# Altium PCB BT_Lamp_Controller.PcbDoc
Units mm, origin at the board's own origin, x right, y up, seen from the top; angles counter-clockwise.
Board outline 34.8 x 36.45 mm, 2 copper layers (Top Layer, Bottom Layer), stack 1.671 mm thick; 25 components, 23 nets, 122 pads, 35 vias.
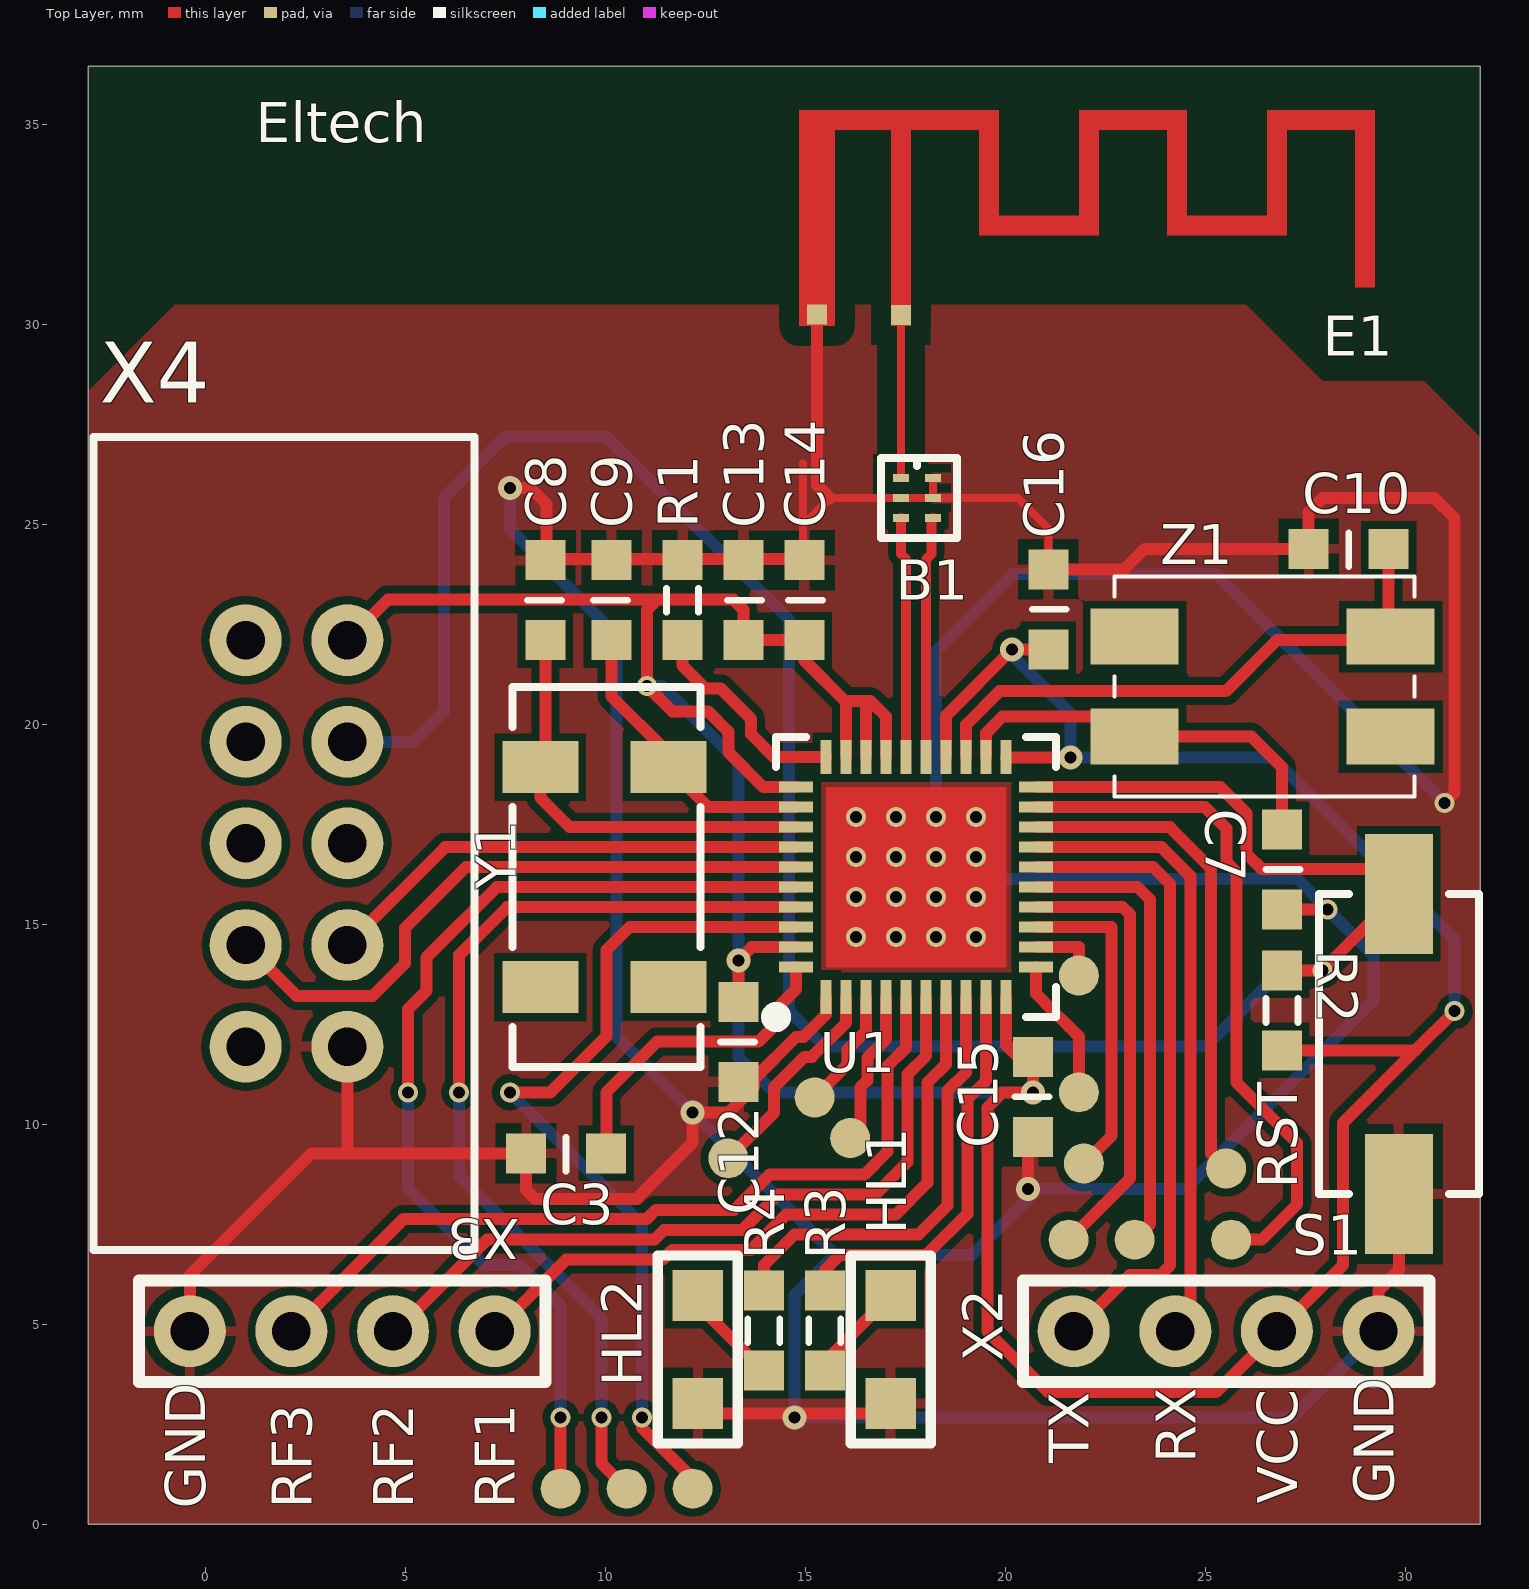
[diagram p0: Top Layer view]
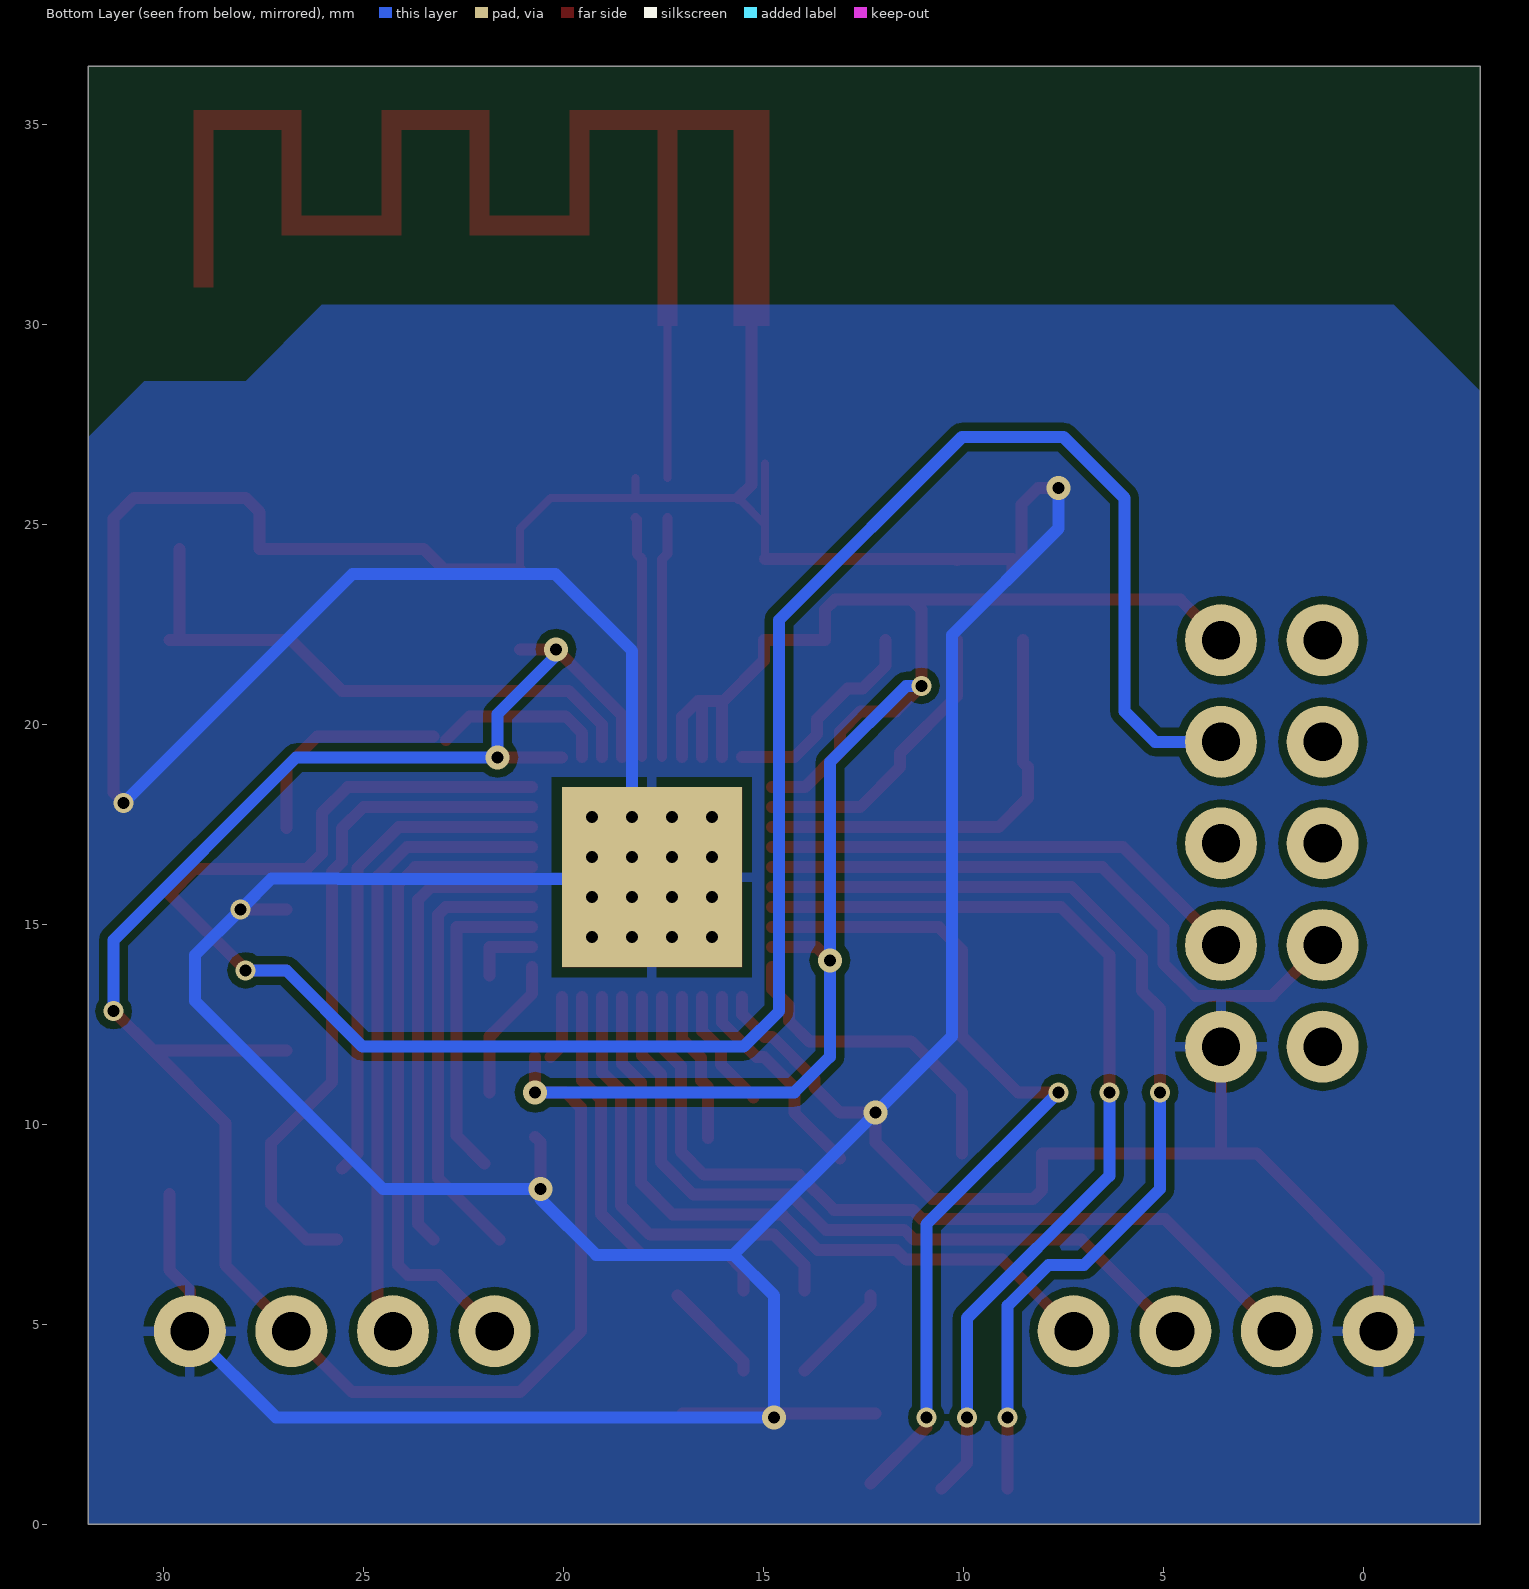
[diagram p1: Bottom Layer view, seen from below]
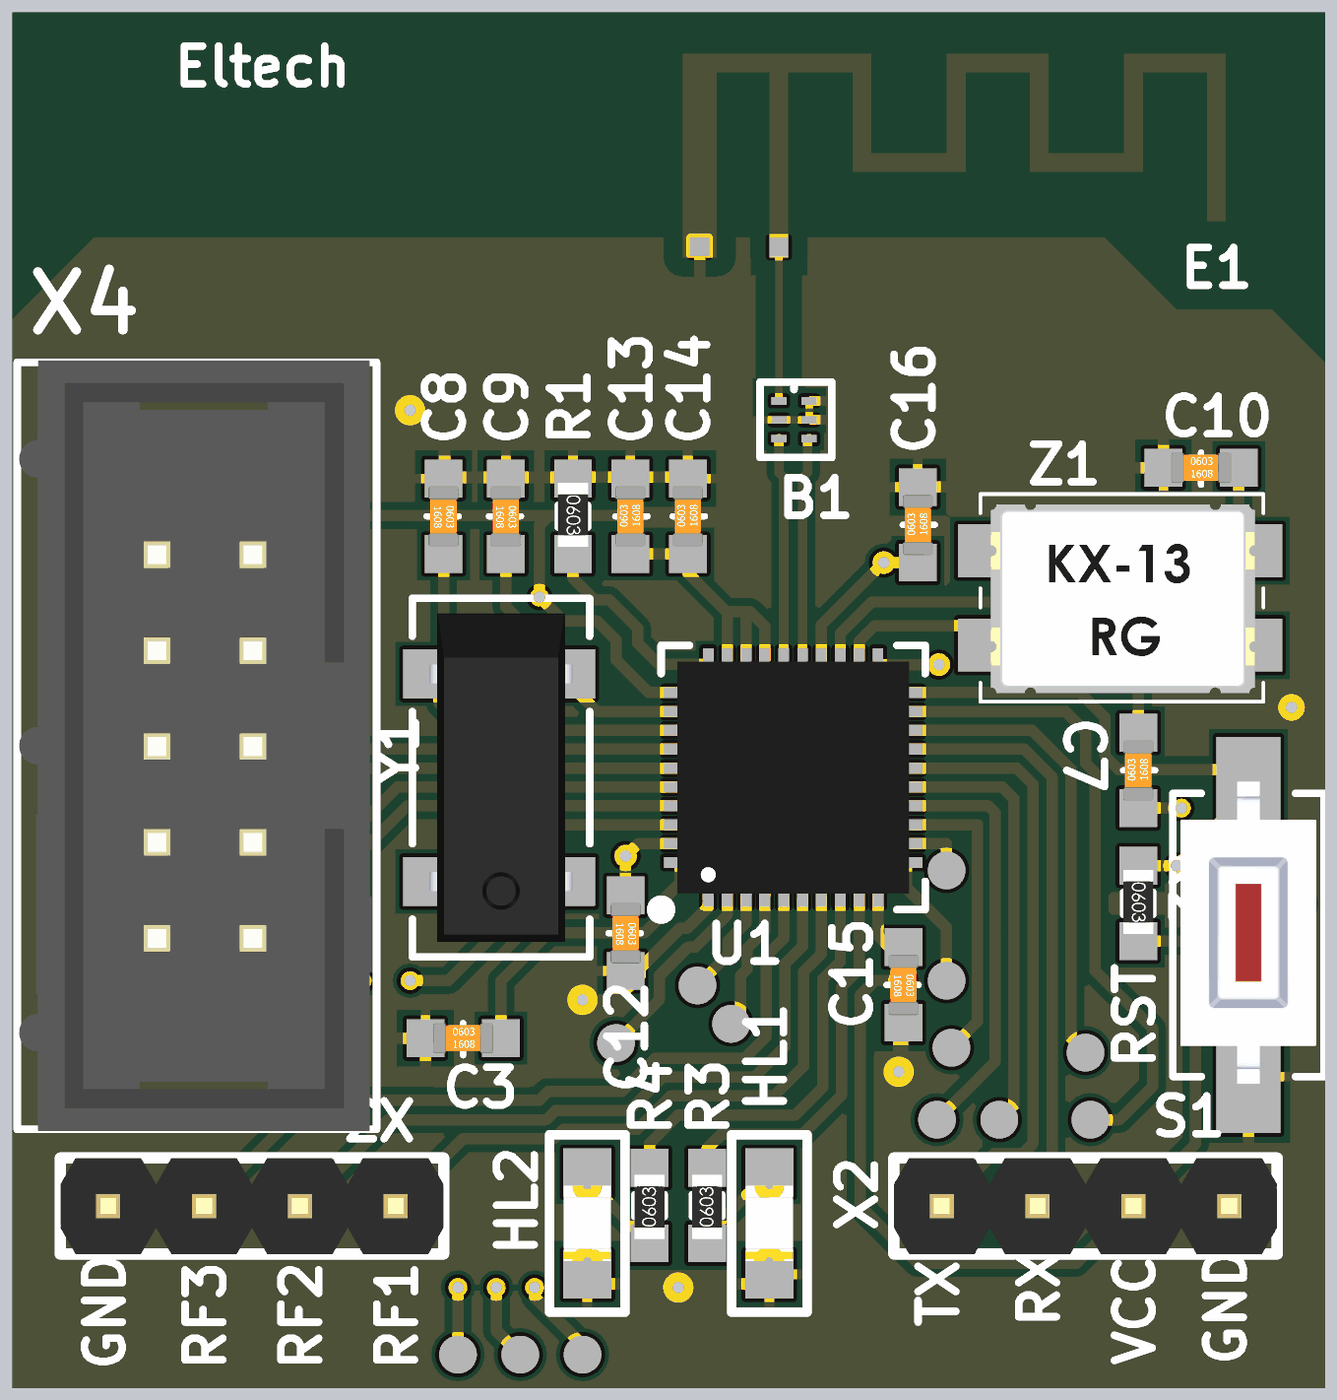
[diagram p2: 3D render of the assembled board from above, using the file's embedded part models]

## Layer stack, top to bottom
Top Solder: solder mask 0.0102, Solder Resist, Dk 3.5
Top Layer: signal copper 0.0356
Dielectric 1: dielectric 1.6, FR-4, Dk 4.8
Bottom Layer: signal copper 0.0356
Bottom Solder: solder mask 0.0102, Solder Resist, Dk 3.5

## Board outline
-2.921,0 -2.921,36.449 31.877,36.449 31.877,0

## Design rules (kind name [scope] priority, off if disabled: settings)
Clearance Poly-Ant [InPoly vs InNet('NetB1_1')] p1: gap=0.5
Clearance Clearance_1 [All] p2: gap=0.2
PolygonConnect "Poly to via" [All vs IsVia] p1: connectstyle=Direct reliefconductorwidth=0.254 reliefentries=4 polygonreliefangle="90 Angle" airgapwidth=0.254
PolygonConnect PolygonConnect_1 [All] p2: connectstyle=Relief reliefconductorwidth=0.254 reliefentries=4 polygonreliefangle="90 Angle" airgapwidth=0.254
RoutingVias [All] p1: holewidth=0.711 width=1.27 viastyle="Through Hole" minholewidth=0.711 minwidth=1.27 maxholewidth=0.711 maxwidth=1.27
ShortCircuit Ant [InNet('GND') vs InNet('NetB1_1')] p1: allowed=TRUE
SolderMaskExpansion Antenna [HasFootprint('2.4 INF Antenna')] p1: expansion=-100
SolderMaskExpansion SolderMaskExpansion_1 [All] p2: expansion=0.102
Width [All] p1: maxlimit=5 minlimit=0.15 preferedwidth=0.254
29 further rules are at their usual default settings.

## Components (designator, comment, footprint, x,y, rotation, side; value= is the part's Value field where it differs from the comment)
B1 "Balun" "2.4 Balun 50Ohm LFB182G45BG2D280" 17.399,26.154 r90 top
C3 "1uF" C0603 8.128,9.271 r0 top
C7 "22pF" C0603 26.924,15.467 r90 top
C8 "10pF" C0603 8.509,23.998 r270 top
C9 "10pF" C0603 10.16,23.998 r270 top
C10 "22pF" C0603 27.691,24.384 r0 top
C12 "100nF" C0603 13.335,12.954 r270 top
C13 "100nF" C0603 13.462,22.198 r90 top
C14 "100nF" C0603 14.986,22.198 r90 top
C15 "100nF" C0603 20.701,11.584 r270 top
C16 "100nF" C0603 21.082,21.971 r90 top
E1 "Antenna" "2.4 INF Antenna" 14.849,29.956 r0 top
HL1 "LED" LED_0805 17.145,5.715 r270 top
HL2 "LED" LED_0805 12.319,5.715 r270 top
R1 "56k" R0603 11.938,23.998 r270 top
R2 "10k" R0603 26.924,13.743 r270 top
R3 "150" R0603 15.494,3.937 r90 top
R4 "150" R0603 13.97,3.937 r90 top
S1 "Tact_switch" Tact_switch_smd 29.845,8.255 r90 top
U1 "CC2541" "QFN40 6x6 0.5pitch" 15.526,13.177 r90 top
X2 "USART" "Pins 4x2.54" 21.717,4.826 r0 top
X3 "RF_DB" "Pins 4x2.54" 7.239,4.826 r180 top
X4 "IDC-10" IDC-10 3.556,11.938 r0 top
Y1 "32.756kHz" "Geyer KX - 327S 32.768kHz" 8.382,18.923 r270 top
Z1 "32MHz" "kx 13 12MHz" 23.241,22.185 r0 top

## Footprints (in the part's own frame and the unit in brackets; to place one, negate y for a bottom-side part, rotate by r counter-clockwise, add the part's x,y. Pads: shape width x height; smd on the part's side, far side on the other; paste and mask are expansions set on the pad)
"2.4 Balun 50Ohm LFB182G45BG2D280" [mm]
  rect 0.2x0.4 smd: 1(0,0) 2(-0.5,0) 3(-1,0) 4(-1,-0.8) 5(-0.5,-0.8) 6(0,-0.8)
  silkscreen extent -1.5,-1.4 0.5,0.5, body extent -1.3,-0.8 0.3,0, height 1
"2.4 INF Antenna" [mm]
  rect 0.5x0.5 smd: 1(2.55,0.27) 2(0.45,0.28)
  Top Layer region: 0,0 0.9,0 0.9,4.9 0,4.9
  Top Layer region: 0,4.9 5,4.9 5,5.4 0,5.4
  Top Layer region: 4.5,2.26 5,2.26 5,4.9 4.5,4.9
  Top Layer region: 5,2.26 7,2.26 7,2.76 5,2.76
  Top Layer region: 7,2.26 7.5,2.26 7.5,4.9 7,4.9
  Top Layer region: 7,4.9 9.7,4.9 9.7,5.4 7,5.4
  Top Layer region: 9.2,2.26 9.7,2.26 9.7,4.9 9.2,4.9
  Top Layer region: 9.7,2.26 11.7,2.26 11.7,2.76 9.7,2.76
  Top Layer region: 11.7,2.26 12.2,2.26 12.2,4.9 11.7,4.9
  Top Layer region: 11.7,4.9 14.4,4.9 14.4,5.4 11.7,5.4
  Top Layer region: 13.9,0.96 14.4,0.96 14.4,4.9 13.9,4.9
  Top Layer region: 2.3,0 2.8,0 2.8,4.9 2.3,4.9
C0603 [mm]
  rect 1x1 smd: 1(-0.1,0) 2(1.9,0)
  silkscreen extent 0.9,-0.45 0.9,0.4, body extent 0.1,-0.4 1.7,0.4, height 0.8
"Geyer KX - 327S 32.768kHz" [mm]
  rect 1.3x1.9 smd: 1(0,0) 2(0,3.2) 3(5.5,3.2) 4(5.5,0)
  silkscreen extent -2,-0.7 7.5,4, body extent -1.6,-0.25 7.1,3.55, height 2.51
IDC-10 [mm]
  round 1.8 hole 0.96: 1(0,0) 2(-2.54,0) 3(0,2.54) 4(-2.54,2.54) 5(0,5.08) 6(-2.54,5.08) 7(0,7.62) 8(-2.54,7.62) 9(0,10.16) 10(-2.54,10.16)
  silkscreen extent -6.35,-5.08 3.17,15.24, body extent -6.3,-5.12 3.05,15.28, height 9.25
"kx 13 12MHz" [mm]
  rect 2.2x1.4 smd: 1(0,-2.5) 2(6.4,-2.5) 3(6.4,0) 4(0,0)
  silkscreen extent -0.5,-4 7,1.5, body extent -0.22,-3.77 6.78,1.23, height 1.3
LED_0805 [mm]
  rect 1.27x1.27 smd: 1(0,0) 2(2.7,0)
  silkscreen extent -1,-1 3.7,1, body extent 0.35,-0.62 2.35,0.63, height 0.81
"Pins 4x2.54" [mm]
  round 1.8 hole 0.96: 1(0,0) 2(2.54,0) 3(5.08,0) 4(7.62,0)
  silkscreen extent -1.27,-1.27 8.89,1.27, body extent -1.27,-1.27 8.89,1.27, height 8.81
"QFN40 6x6 0.5pitch" [mm]
  rect 0.85x0.28 smd: 1(0,0) 2(0,-0.5) 3(0,-1) 4(0,-1.5) 5(0,-2) 6(0,-2.5) 7(0,-3) 8(0,-3.5) 9(0,-4) 10(0,-4.5) 21(6,-4.5) 22(6,-4) 23(6,-3.5) 24(6,-3) 25(6,-2.5) 26(6,-2) 27(6,-1.5) 28(6,-1) 29(6,-0.5) 30(6,0)
  rect 0.28x0.85 smd: 11(0.75,-5.25) 12(1.25,-5.25) 13(1.75,-5.25) 14(2.25,-5.25) 15(2.75,-5.25) 16(3.25,-5.25) 17(3.75,-5.25) 18(4.25,-5.25) 19(4.75,-5.25) 20(5.25,-5.25) 31(5.25,0.75) 32(4.75,0.75) 33(4.25,0.75) 34(3.75,0.75) 35(3.25,0.75) 36(2.75,0.75) 37(2.25,0.75) 38(1.75,0.75) 39(1.25,0.75) 40(0.75,0.75)
  rect 4.5x4.5 smd far side: 41(2.997,-2.261)
  Top Layer region: 5.25,0 5.25,-4.5 0.75,-4.5 0.75,-0.75 0.75,0 1.5,0
  silkscreen extent -0.75,-5.75 6.5,1.5, body extent -0.07,-5.32 6.08,0.83, height 1.03
R0603 [mm]
  rect 1x1 smd: 1(-0.1,0) 2(1.9,0)
  silkscreen extent 0.6,-0.4 1.2,0.4, body extent 0.01,-0.4 1.71,0.4, height 0.56
Tact_switch_smd [mm]
  rect 3x1.7 smd: 1(0,0) 2(7.5,0)
  silkscreen extent 0,-2 7.5,2, body extent -0.19,-1.8 7.81,1.8, height 2.51

## Part data
B1: library part "2.4 Balun 50Ohm LFB182G45BG2D280"
C3 C7 C8 C9 C10 C12 C13 C14 C15 C16: library part Condensator
R1 R2 R3 R4: library part Resistor
X2 X3: library part "Pins 4x2.54"
Y1: library part "Crystal Oscillator"
Z1: library part "KX 13 Geyer"

## Free pads (board coordinates)
  round 1 smd: 2(16.129,9.652) 3(13.081,9.144) 4(15.24,10.668) 5(8.89,0.889) 6(10.541,0.889) 7(12.192,0.889) 8(23.241,7.112) 9(21.59,7.112) 10(21.971,9.017) 11(21.844,13.716) 12(21.844,10.795) 13(25.527,8.89) 14(25.654,7.112)

## Via types
v1: diameter 0.5, hole 0.3, Top Layer to Bottom Layer, 27 vias
v2: diameter 0.6, hole 0.3, Top Layer to Bottom Layer, 8 vias

## Nets (pads, with @x,y where several pads share a name; then routed paths per layer and width w, separated by ;. In a path a pad name is that pad's centre, name@x,y a point inside that pad or via, vN(x,y) a via of type N, cw(c..) or ccw(c..) an arc to the next point about the centre after c; other vN are vias at no path point)
DEBUG_DC: U1.34 X4.3 | length 12.2
  Top Layer w0.3: X4.3 6.005,16.927 U1.34
DEBUG_DD: U1.35 X4.4 | length 16.1
  Top Layer w0.3: X4.4 2.286,13.208 4.191,13.208 4.996,14.013 4.996,14.902 6.521,16.427 U1.35
GND: B1.2 B1.5 B1.6 C3.1 C7.1 C8.1 C9.1 C10.1 C12.2 C13.2 C14.2 C15.2 C16.2 E1.2 HL1.2 HL2.2 R1.1 S1.1 U1.1 U1.41 X2.4 X3.4 X4.1 | length 171.4
  Top Layer w0.2: C14.2@14.954,24.13 14.954,24.987 ; 14.954,26.511 14.954,24.987 ; B1.6 B1.5 ; C16.2 21.082,24.892 20.32,25.654 B1.5 ; 14.954,24.987 15.621,25.654 B1.2 B1.5
  Top Layer w0.3: X3.4@-0.381,4.699 -0.381,6.223 2.667,9.271 3.556,9.271 ; X4.1 3.556,9.271 ; v2(7.62,25.908) 8.128,25.908 8.541,25.495 8.541,24.13 C8.1 8.763,23.844 8.763,24.13 C9.1@10.16,24.13 ; C9.1 C9.1@10.16,24.13 ; HL2.2@12.192,2.761 HL1.2@17.018,2.761 ; C14.2@14.954,24.13 C9.1@10.16,24.13 ; E1.2 15.299,25.976 15.621,25.654 ; U1.1 15.526,12.746 14.964,12.184 14.779,12.184 13.724,11.129 13.724,10.93 13.081,10.287 v2(12.192,10.287) 12.192,9.542 10.778,8.128 8.255,8.128 8.028,8.355 C3.1 3.556,9.271 ; v2(20.574,8.382) 20.574,9.557 C15.2 ; C16.2 22.982,23.871 23.495,24.384 C10.1 27.591,25.305 27.94,25.654 30.734,25.654 31.242,25.146 31.242,18.288 v1(30.988,18.034) ; C7.1 v1(28.067,15.367) ; X2.4@29.337,5.084 29.337,5.842 29.845,6.35 S1.1
  Bottom Layer w0.3: v2(7.62,25.908) 7.62,24.892 10.287,22.225 10.287,12.192 v2(12.192,10.287) 15.748,6.731 ; v1(18.276,16.677) v1(19.276,16.677) 19.824,16.129 25.624,16.129 25.639,16.144 27.29,16.144 v1(28.067,15.367) 29.21,14.224 29.21,13.081 24.511,8.382 v2(20.574,8.382) 20.574,8.128 19.177,6.731 15.748,6.731 ; v1(18.276,17.677) 18.276,21.832 20.193,23.749 25.273,23.749 v1(30.988,18.034) ; X2.4 27.178,2.667 v2(14.732,2.667) 14.732,5.715 15.748,6.731
  other v1: 16.276,14.677 17.276,14.677 18.276,14.677 19.276,14.677 16.276,15.677 17.276,15.677 18.276,15.677 19.276,15.677 16.276,16.677 17.276,16.677 16.276,17.677 17.276,17.677 19.276,17.677
NetB1_1: B1.1 E1.1 | length 4.1
  Top Layer w0.2: B1.1 E1.1
NetC3_2: C3.2 U1.40 | length 8.1
  Top Layer w0.3: C3.2@10.033,9.271 10.033,10.795 11.303,12.065 13.843,12.065 14.351,12.573 14.351,12.954 14.776,13.379 U1.40
NetC7_2: C7.2 U1.22 Z1.1 | length 10
  Top Layer w0.3: U1.22 19.526,19.78 19.939,20.193 22.342,20.193 Z1.1@22.937,19.598 ; Z1.1 26.162,19.685 26.924,18.923 C7.2@26.924,17.399
NetC8_2: C8.2 U1.33 Y1.1 | length 10.7
  Top Layer w0.3: C8.2 8.509,19.05 Y1.1 8.382,18.161 9.116,17.427 U1.33
NetC9_2: C9.2 U1.32 Y1.2 | length 7.4
  Top Layer w0.3: C9.2 10.16,20.701 11.582,19.279 Y1.2 12.578,17.927 U1.32
NetC10_2: C10.2 U1.23 Z1.3 | length 14.7
  Top Layer w0.3: U1.23 19.026,19.987 19.867,20.828 25.527,20.828 26.797,22.098 Z1.3@29.845,22.098 ; Z1.3@29.591,22.235 C10.2
NetHL1_1: HL1.1 R3.1 | length 2.6
  Top Layer w0.3: R3.1 15.494,4.064 HL1.1
NetHL2_1: HL2.1 R4.1 | length 2.6
  Top Layer w0.3: HL2.1 12.319,5.488 R4.1
NetR1_2: R1.2 U1.30 | length 5.4
  Top Layer w0.3: R1.2 11.938,21.463 12.509,20.892 12.89,20.892 13.652,20.13 13.652,19.748 14.224,19.177 U1.30
PWM1: R3.2 U1.9 | length 10.3
  Top Layer w0.3: R3.2 15.494,6.35 15.875,6.731 18.034,6.731 19.058,7.755 19.058,10.621 19.526,11.089 U1.9
PWM2: R4.2 U1.8 | length 11.3
  Top Layer w0.3: R4.2 13.97,6.477 14.732,7.239 17.835,7.239 18.558,7.962 18.558,10.828 19.026,11.296 U1.8
RESET_N: R2.1 S1.2 U1.20 X4.7 | length 58
  Top Layer w0.3: U1.20 25.388,18.427 26.035,17.78 26.035,16.761 26.413,16.383 29.217,16.383 S1.2 27.933,13.843 R2.1
  Bottom Layer w0.3: X4.7 5.207,19.558 5.969,20.32 5.969,25.654 7.493,27.178 10.033,27.178 14.605,22.606 14.605,12.827 15.494,11.938 25.019,11.938 26.924,13.843 v1(27.94,13.843)
RF_DEBUG1: U1.7 X3.1 | length 17.2
  Top Layer w0.3: X3.1 9.025,6.612 11.438,6.612 11.684,6.858 13.644,6.858 14.525,7.739 17.264,7.739 18.058,8.533 18.058,11.035 18.526,11.503 U1.7
RF_DEBUG2: U1.6 X3.2 | length 19
  Top Layer w0.3: X3.2@4.699,4.699 4.699,4.763 7.048,7.112 11.231,7.112 11.477,7.358 13.437,7.358 14.318,8.239 16.748,8.239 17.558,9.049 17.558,11.242 18.026,11.71 U1.6
RF_DEBUG3: U1.5 X3.3 | length 20.9
  Top Layer w0.3: X3.3@2.159,4.699 X3.3 4.699,7.366 4.961,7.628 11.04,7.628 11.27,7.858 13.23,7.858 14.111,8.739 16.486,8.739 17.058,9.311 17.058,11.45 17.526,11.918 U1.5
RF_N: B1.3 U1.26 | length 6
  Top Layer w0.25: B1.3 17.399,24.257 17.526,24.13 U1.26
RF_P: B1.4 U1.25 | length 6
  Top Layer w0.25: U1.25 18.026,24.122 18.161,24.257 18.161,25.116 B1.4
USART_RX: U1.17 X2.2 | length 15.7
  Top Layer w0.3: U1.17 23.912,16.927 24.638,16.201 24.638,5.207 X2.2
USART_TX: U1.16 X2.1 | length 16.2
  Top Layer w0.3: U1.16 23.705,16.427 24.13,16.002 24.13,6.477 23.876,6.223 23.114,6.223 X2.1
VCC: C12.1 C13.1 C14.1 C15.1 C16.1 R2.2 U1.10 U1.21 U1.24 U1.27 U1.28 U1.29 U1.31 U1.39 X2.3 X4.9 | length 101.2
  Top Layer w0.3: X4.9 4.572,23.114 11.303,23.114 ; C12.1 v2(13.335,14.097) 13.665,14.427 U1.39 ; U1.31 13.958,18.427 13.081,19.304 13.081,19.812 12.573,20.32 11.684,20.32 v1(11.049,20.955) 11.049,22.86 11.303,23.114 ; U1.29 16.026,20.55 16.002,20.574 ; U1.28 16.526,20.463 ; U1.27 17.026,20.185 16.637,20.574 16.002,20.574 ; U1.24 18.526,20.217 v2(20.18,21.871) C16.1 ; U1.10 20.026,11.978 C15.1@20.32,11.684 ; U1.21@20.026,19.168 v2(21.641,19.168) ; C15.1 v2(20.701,10.795) 19.939,10.795 19.558,10.414 19.558,4.826 21.082,3.302 25.273,3.302 28.448,6.477 28.448,10.033 30.258,11.843 ; R2.2 30.258,11.843 ; v1(31.242,12.827) 30.258,11.843 ; 11.303,23.114 13.208,23.114 13.462,22.86 C13.1 C14.1 14.986,21.59 16.002,20.574
  Bottom Layer w0.3: v1(11.049,20.955) 11.43,20.955 13.335,19.05 v2(13.335,14.097) 13.335,11.684 14.224,10.795 v2(20.701,10.795) ; v2(20.18,21.871) 20.18,21.719 21.641,20.258 v2(21.641,19.168) 26.679,19.168 31.242,14.605 v1(31.242,12.827)
pads on no net: U1.2 U1.3 U1.4 U1.11 U1.12 U1.13 U1.14 U1.15 U1.18 U1.19 U1.36 U1.37 U1.38 X4.2 X4.5 X4.6 X4.8 X4.10 Y1.3 Y1.4 Z1.2 Z1.4
copper on no net: | length 149.5
  Top Layer w0.3: v1(5.08,10.795) 5.08,12.879 5.536,13.335 5.536,14.172 7.291,15.927 14.776,15.927 ; v1(6.35,10.795) 6.35,14.224 7.553,15.427 8.335,15.427 14.776,15.427 ; v1(7.62,10.795) 8.636,10.795 10.033,12.192 10.033,14.351 10.609,14.927 14.776,14.927 ; 8.89,0.889 v1(8.89,2.667) ; v1(9.906,2.667) 9.906,1.524 10.541,0.889 ; v1(10.922,2.667) 10.922,2.413 12.319,1.016 ; 13.081,9.144 14.224,10.287 14.224,10.922 14.986,11.684 15.171,11.684 16.026,12.539 16.026,13.177 ; 15.24,10.668 16.058,11.486 16.058,11.864 16.526,12.332 16.526,13.177 ; 16.383,9.652 16.383,10.922 16.558,11.097 16.558,11.657 17.026,12.125 17.026,13.177 ; 20.776,13.927 20.776,13.26 21.209,12.827 21.59,12.446 21.844,12.192 21.844,10.795 ; 20.776,14.427 21.844,14.427 21.844,13.716 ; 20.776,14.927 22.665,14.927 22.665,14.419 22.665,10.854 22.665,9.711 21.971,9.017 ; 20.776,15.427 22.943,15.427 23.13,15.24 23.13,14.367 23.13,9.668 23.13,8.652 22.44,7.962 21.59,7.112 ; 20.776,15.927 23.316,15.927 23.63,15.613 23.63,14.097 23.63,8.644 23.63,7.501 23.241,7.112 ; 20.776,17.427 24.119,17.427 25.146,16.4 25.146,12.065 25.146,9.271 25.527,8.89 ; 20.776,17.927 24.999,17.927 25.535,17.391 25.535,16.554 25.781,16.308 25.781,11.049 27.305,9.525 27.305,8.001 26.416,7.112 25.654,7.112
  Bottom Layer w0.3: v1(5.08,10.795) 5.08,8.382 6.985,6.477 7.874,6.477 8.89,5.461 v1(8.89,2.667) ; v1(6.35,10.795) 6.35,8.708 9.906,5.152 v1(9.906,2.667) ; v1(7.62,10.795) 10.922,7.493 v1(10.922,2.667)

## Polygon pours and split planes (outlines as drawn)
GND on Top Layer "Top Layer-No Net" (solid, pour order 0): -2.921,0 31.877,0 31.877,27.178 30.48,28.575 27.94,28.575 26.035,30.48 -0.635,30.48 -0.762,30.48 -2.921,28.321
GND on Bottom Layer "Top Layer-No Net" (solid, pour order 4): -2.921,0 31.877,0 31.877,27.178 30.48,28.575 27.94,28.575 26.035,30.48 -0.635,30.48 -0.762,30.48 -2.921,28.321

## Silkscreen, mask and mechanical layers (free items; w line width, h text height)
Top Overlay:
  text "Eltech" at 1.27,34.544 h1
  text "RST" at 27.305,8.382 h1 r90
  text "TX" at 22.098,1.524 h1 r90
  text "RX" at 24.765,1.524 h1 r90
  text "VCC" at 27.305,0.508 h1 r90
  text "GND" at 29.718,0.508 h1 r90
  text "GND" at 0,0.381 h1 r90
  text "RF3" at 2.667,0.381 h1 r90
  text "RF2" at 5.207,0.381 h1 r90
  text "RF1" at 7.747,0.381 h1 r90